# Altium PCB v2.PcbDoc
Units mil, origin at the board's own origin, x right, y up, seen from the top; angles counter-clockwise.
Board outline 2590 x 1100 mil, 2 copper layers (Top Layer, Bottom Layer); 48 components, 27 nets, 181 pads, 111 vias.
Unrouted connection lines stored in the file: 18.
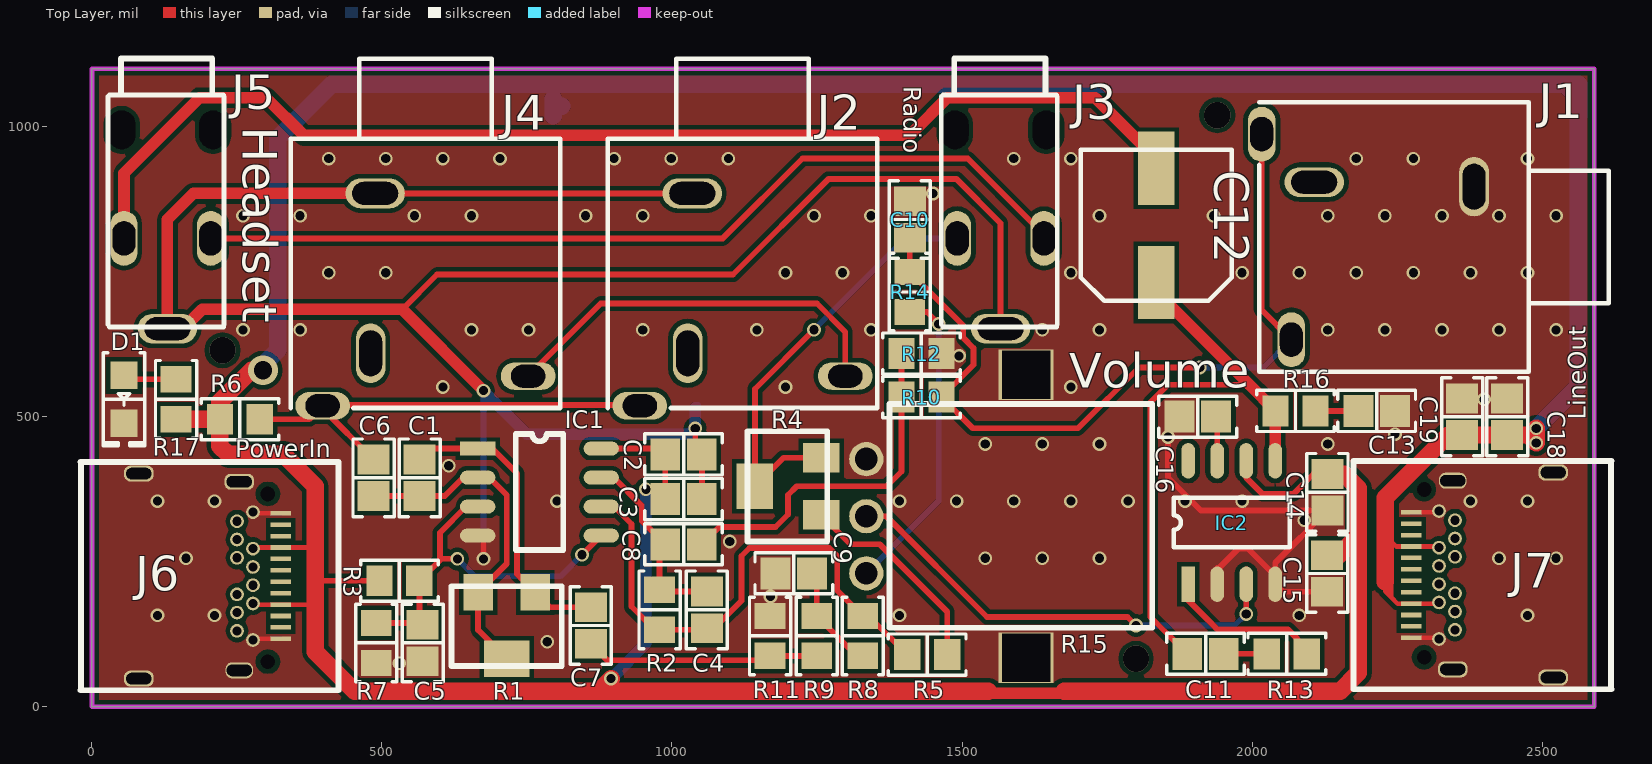
[diagram p0: Top Layer view]
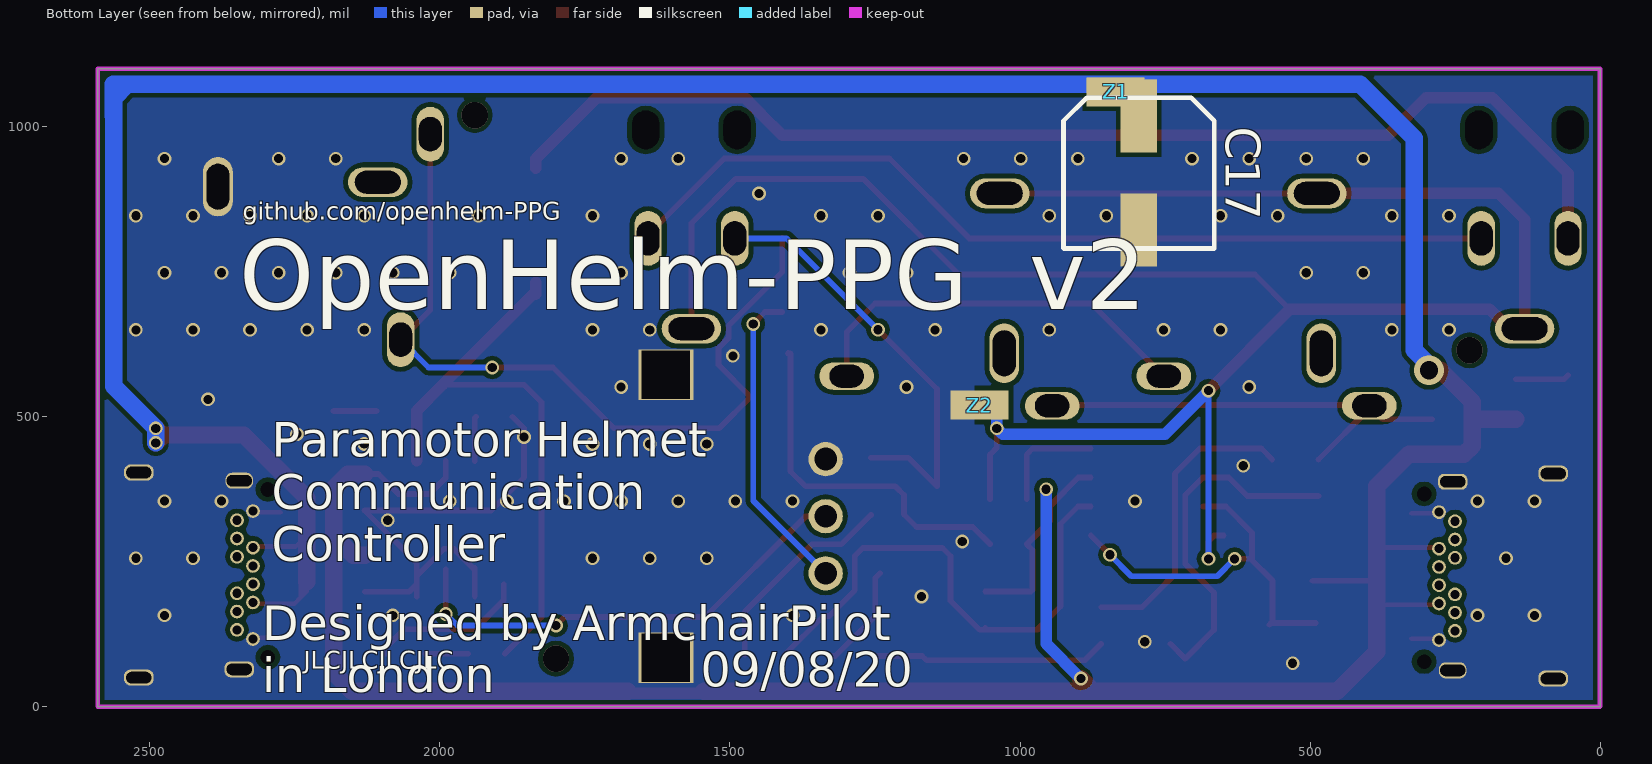
[diagram p1: Bottom Layer view, seen from below]
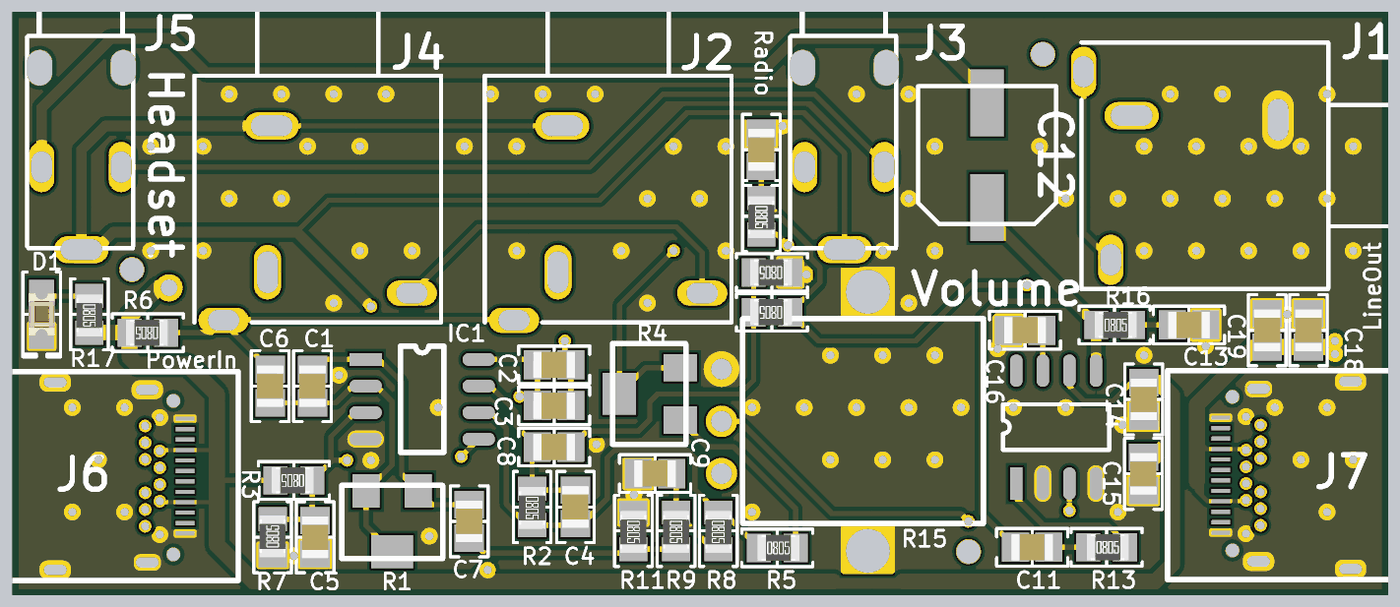
[diagram p2: 3D render of the assembled board from above, using the file's embedded part models]

## Layer stack, top to bottom
Top Solder: solder mask 0.4, Solder Resist, Dk 3.5
Top Layer: signal copper 1.4
Dielectric 1: dielectric 12.6, FR-4, Dk 4.8
Bottom Layer: signal copper 1.4
Bottom Solder: solder mask 0.4, Solder Resist, Dk 3.5

## Board outline
0,0 2590,0 2590,1100 0,1100

## Design rules (kind name [scope] priority, off if disabled: settings)
BoardOutlineClearance [All] p1: gap=7.87 ignorepadtopadclearanceinfootprint=FALSE except(15.75: Arc-SplitBarrior Arc-SplitContinuation Track-SplitBarrior Track-SplitContinuation SMDPad-SplitBarrior SMDPad-SplitContinuation THPad-SplitBarrior THPad-SplitContinuation Via-SplitBarrior Via-SplitContinuation Fill-SplitBarrior Fill-SplitContinuation Poly-SplitBarrior Poly-SplitContinuation Region-SplitBarrior Region-SplitContinuation Text-SplitBarrior Text-SplitContinuation)
Clearance "Clearance Bottom Layer" [OnLayer('Bottom Layer')] p1: gap=8 ignorepadtopadclearanceinfootprint=TRUE except(10: Arc-Text Track-Text SMDPad-Text THPad-Text Via-Text Fill-Text Poly-Text Region-Text Text-Text)
Clearance "Clearance Top Layer" [OnLayer('Top Layer')] p2: gap=8 ignorepadtopadclearanceinfootprint=TRUE except(10: Arc-Text Track-Text SMDPad-Text THPad-Text Via-Text Fill-Text Poly-Text Region-Text Text-Text)
Clearance [All] p3: gap=7.87 ignorepadtopadclearanceinfootprint=FALSE except(3.5: Arc-Arc Arc-Track Arc-SMDPad Track-Track Track-SMDPad SMDPad-SMDPad; 5: Arc-Via Track-Via SMDPad-Via THPad-Via Via-Via; 10: Arc-Text Track-Text SMDPad-Text THPad-Text Via-Text Fill-Text Poly-Text Region-Text Text-Text)
ComponentClearance Ignore [HasFootprint('NetConnector') Or HasFootprint('RK09') Or HasFootprint('LUMBERG150105')] p1: gap=0 collisioncheckmode=3 verticalgap=0 showdistances=FALSE
ComponentClearance ComponentClearance_1 [All] p2: gap=10 collisioncheckmode=3 verticalgap=10 showdistances=FALSE
HoleSize [All] p1: absolutevalues=TRUE maxlimit=248.03 minlimit=7.87 maxpercent=80.000 minpercent=20.000
MinimumAnnularRing [All] p1: minimumring=3
MinimumSolderMaskSliver [All] p1: minsoldermaskwidth=3.94
PolygonConnect PolygonConnect_1 [All] p1: connectstyle=Direct reliefconductorwidth=20 reliefentries=4 polygonreliefangle="90 Angle" airgapwidth=10
RoutingCorners [All] p1: cornerstyle=Round minsetback=100 maxsetback=100
RoutingVias [All] p1: holewidth=19.68 width=39.37 viastyle="Through Hole" minholewidth=7.87 minwidth=17.72 maxholewidth=39.37 maxwidth=78.74
ShortCircuit "Ignore GND-AGND" [InNet('GND') vs InNet('AGND')] p1: allowed=TRUE
ShortCircuit "Ignore VCC-VUSB" [InNet('VCC') vs InNet('VUSB')] p2: allowed=TRUE
ShortCircuit [All] p3: allowed=FALSE
SilkToSilkClearance [All] p1: silktosilkclearance=3.94
SilkToSolderMaskClearance [IsPad] p1: minsilkscreentomaskgap=3.94 clearancetoexposedcopper=TRUE
SolderMaskExpansion [All] p1: expansion=4
Width [All] p1: maxlimit=100 minlimit=3.5 preferedwidth=15
23 further rules are at their usual default settings.

## Components (designator, comment, footprint, x,y, rotation, side; value= is the part's Value field where it differs from the comment)
C1 "330pF" "CAP 0805_2012" 565,394.69 r90 top
C2 "100nF" "CAP 0805_2012" 1020,435 r180 top
C3 "22uF" "CAP 0805_2012" 1020,357.99 r180 top
C4 "330pF" "CAP 0805_2012" 1060,167.05 r90 top
C5 "100nF" "CAP 0805_2012" 570,110 r90 top
C6 "4.7uF" "CAP 0805_2012" 485.39,394.69 r270 top
C7 "2.2uF" "CAP 0805_2012" 860,140 r270 top
C8 "2.2uF" "CAP 0805_2012" 1020,280 r0 top
C9 "220nF" "CAP 0805_2012" 1210,230 r0 top
C10 "100nF" "CAP 0805_2012" 1410,840 r270 top
C11 "33nF" "CAP 0805_2012" 1920,91.18 r0 top
C12 "470uF" EEEFT-D8 1835,830 r90 top
C13 "470nF" "CAP 0805_2012" 2215,510 r180 top
C14 "100nF" "CAP 0805_2012" 2130,369.69 r90 top
C15 "22uF" "CAP 0805_2012" 2129.45,229.69 r90 top
C16 "100nF" "CAP 0805_2012" 1906.5,500 r0 top
C17 "470uF" EEEFT-D8 795,920 r270 bottom
C18 "100nF" "CAP 0805_2012" 2440,500 r270 top
C19 "22uF" "CAP 0805_2012" 2362.28,500 r270 top
D1 "Red" "LED 0805_2012 RED" 55.2,530 r270 top
IC1 "LM4562" LM4562 665,445 r270 top
IC2 "LM386" LM386D 1890,211.3 r0 top
J1 "LineOut" KLBR4 2245,810 r270 top locked
J2 "Radio" KLBR4 1121.61,747.2 r0 top locked
J3 "Radio-2.5" LUMBERG150105 1566.5,835 r0 top locked
J4 "Headset-3.5" KLBR4 574.88,747.2 r0 top locked
J5 "Headset" LUMBERG150105 130,835 r0 top locked
J6 "PowerIn" MC001002 303.15,367.01 r270 top locked
J7 "USB-C-Power-Out" MC001002 2296.85,85.32 r90 top locked
R1 "Gain" 3224W 715,140 r0 top value=20k
R2 "22k" "RES 0805_2012" 978.5,167.05 r270 top
R3 "100k" "RES 0805_2012" 530,217.2 r180 top
R4 "RadioIn" 3224W 1200,380 r270 top value=50k
R5 "22k" "RES 0805_2012" 1440,90 r0 top
R6 "5.6K" "RES 0805_2012" 255,495.55 r180 top value=5.6k
R7 "100k" "RES 0805_2012" 490,110 r90 top
R8 "22k" "RES 0805_2012" 1329.02,122.13 r270 top
R9 "33" "RES 0805_2012" 1249.57,122.13 r270 top
R10 "33" "RES 0805_2012" 1430,533.9 r180 top
R11 "5.6k" "RES 0805_2012" 1169.05,122.13 r270 top
R12 "5.6k" "RES 0805_2012" 1430,608.9 r180 top
R13 "15k" "RES 0805_2012" 2060,91.18 r0 top
R14 "91k" "RES 0805_2012" 1410,715 r270 top
R15 "Volume" RK09 1335,328.43 r270 top locked value=10K
R16 "5.1" "RES 0805_2012" 2075,510 r0 top
R17 "180" "RES 0805_2012" 145,530 r270 top
Z1 "NetConnector" NetConnector 835,1060 r0 bottom
Z2 "NetConnector" NetConnector 1070,520 r0 bottom

## Footprints (in the part's own frame and the unit in brackets; to place one, negate y for a bottom-side part, rotate by r counter-clockwise, add the part's x,y. Pads: shape width x height; smd on the part's side, far side on the other; paste and mask are expansions set on the pad)
3224W [mm]
  rect 1.3x1.6 smd: 1(-1.25,1.45) 3(1.25,1.45)
  rect 2x1.6 smd: 2(0,-1.45)
  silkscreen extent -2.41,-1.78 2.41,1.72
"CAP 0805_2012" [mm] "Chip Capacitor, 2-Leads, Body 2.00x1.20mm, IPC Medium Density"
  rect 1.3x1.4 smd: 1(-0.8,0) 2(0.8,0)
  silkscreen extent -1.7,-0.9 1.7,0.9, body extent -1,-0.64 1,0.64, height 1.26
EEEFT-D8 [mm]
  rect 3.2x1.6 smd: 1(-2.5,0) 2(2.5,0)
  silkscreen extent -3.3,-3.3 3.3,3.3
KLBR4 [mm]
  oval 1.3x2.6 hole 1 slot 2 at 90 deg: B(-2.4,-3.5)
  oval 2.4x1.2 hole 1 slot 1.5 at 0 deg: R(-4.5,-5.8) T(4.5,-4.5)
  oval 2.6x1.3 hole 1 slot 2 at 0 deg: S(-2.2,3.5)
  silkscreen extent -5.9,-5.9 5.9,9.4
"LED 0805_2012 RED" [mm] "Chip Diode, 2-Leads, Body 2.00x1.25mm, IPC Medium Density"
  rect 1.2x1.2 smd: 1(-1.05,0) 2(1.05,0)
  silkscreen extent -2.03,-0.9 2.03,0.9, body extent -1,-0.62 1,0.63, height 0.9
LM386D [mm]
  rect 0.6x1.55 smd: 1(0,0)
  oval 0.6x1.55 smd: 2(1.27,0) 3(2.54,0) 4(3.81,0) 5(3.81,5.4) 6(2.54,5.4) 7(1.27,5.4) 8(0,5.4)
  silkscreen extent -0.64,1.61 4.44,3.79
LM4562 [mil]
  rect 24x61 smd: 1(0,0)
  oval 24x61 smd: 2(50,0) 3(100,0) 4(150,0) 5(150,213) 6(100,213) 7(50,213) 8(0,213)
  silkscreen extent -25,66 175,148
LUMBERG150105 [mm]
  oval 1.2x2.4 hole 1 slot 1.5 at 90 deg: R(1.9,-0.699) T(-1.9,-0.699)
  oval 2.6x1.3 hole 1 slot 2 at 0 deg: S(0,-4.65)
  round 0 hole 1.2 slot 1.7 at 90 deg: ""(-2,4.052) ""(2,4.052)
  silkscreen extent -2.6,-4.58 2.48,7.18
MC001002 [mm]
  rect 0.2x0.9 smd: A1(0.85,0.56) A2(1.35,0.56) A3(1.85,0.56) A4(2.35,0.56) A5(2.85,0.56) A6(3.35,0.56) A7(3.85,0.56) A8(4.35,0.56) A9(4.85,0.56) A10(5.35,0.56) A11(5.85,0.56) A12(6.35,0.56)
  round 0.6 hole 0.4: B1(6.4,-0.65) B2(6,-1.35) B3(5.2,-1.35) B4(4.8,-0.65) B5(4.4,-1.35) B6(4,-0.65) B7(3.2,-0.65) B8(2.8,-1.35) B9(2.4,-0.65) B10(2,-1.35) B11(1.2,-1.35) B12(0.8,-0.65)
  rrect80% 0.7x1.3 hole 1.1 slot 0.5 at 0 deg: S1(-0.53,-1.25) S3(-0.89,-5.65) S4(8.09,-5.65)
  rrect80% 0.7x1.2 hole 1.1 slot 0.5 at 0 deg paste+0 mask+0.05: S2(7.73,-1.25)
  round 0 hole 0.65 mask+0: ""(0,0) ""(7.35,0)
  silkscreen extent -1.4,-8.2 8.6,3.1
NetConnector [mil]
  rect 50x50 smd paste+0 mask+0: 1(-25,0) 2(25,0)
"RES 0805_2012" [mm] "Chip Resistor, 2-Leads, Body 2.00x1.25mm, IPC Medium Density"
  rect 1.15x1.35 smd: 1(-0.875,0) 2(0.875,0)
  silkscreen extent -1.7,-0.9 1.7,0.9, body extent -0.95,-0.62 1.05,0.63, height 0.6
RK09 [mm]
  round 1.5 hole 1: 1(-2.5,0) 2(0,0) 3(2.5,0)
  rect 2.2x2.4 hole 2.1 square: ""(-6.2,7) ""(6.2,7)
  silkscreen extent -4.91,1.02 4.89,12.52

## Part data
C1 C4: library part C0805C565K9PACTU, "Multilayer Ceramic Capacitors MLCC - SMD/SMT 330pF 50V 0805 RoHS", Device Package="0805 (2012 Metric)", Supplier Part Number 1=C51207, Voltage - Rated=50V, ComponentLink1Description=Datasheet, ComponentLink1URL=https://api.kemet.com/component-edge/download/datasheet/C0805C565K9PACTU.pdf, ComponentLink2Description="DigiKey Link", ComponentLink2URL=http://digikey.com/product-detail/en/kemet/C0805C565K9PACTU/399-3135-1-ND/551640, Package / Case="0805 (2012 Metric)", Supplier 1=LCSC
C2 C5 C10 C14 C16 C18: library part C0805C565K9PACTU, "Multilayer Ceramic Capacitors MLCC - SMD/SMT 100nF 50V 0805 RoHS", Device Package="0805 (2012 Metric)", Supplier Part Number 1=C49678, Voltage - Rated=50V, ComponentLink1Description=Datasheet, ComponentLink1URL=https://api.kemet.com/component-edge/download/datasheet/C0805C565K9PACTU.pdf, ComponentLink2Description="DigiKey Link", ComponentLink2URL=http://digikey.com/product-detail/en/kemet/C0805C565K9PACTU/399-3135-1-ND/551640, Package / Case="0805 (2012 Metric)", Supplier 1=LCSC
C3 C15 C19: library part C0805C565K9PACTU, "Multilayer Ceramic Capacitors MLCC - SMD/SMT 22uF 25V 0805 RoHS", Device Package="0805 (2012 Metric)", Supplier Part Number 1=C45783, Voltage - Rated=25V, ComponentLink1Description=Datasheet, ComponentLink1URL=https://api.kemet.com/component-edge/download/datasheet/C0805C565K9PACTU.pdf, ComponentLink2Description="DigiKey Link", ComponentLink2URL=http://digikey.com/product-detail/en/kemet/C0805C565K9PACTU/399-3135-1-ND/551640, Package / Case="0805 (2012 Metric)", Supplier 1=LCSC
C6: library part C0805C565K9PACTU, "Multilayer Ceramic Capacitors MLCC - SMD/SMT 4.7uF 25V 0805 RoHS", Device Package="0805 (2012 Metric)", Supplier Part Number 1=C1779, Voltage - Rated=25V, Package / Case="0805 (2012 Metric)", Supplier 1=LCSC
C7 C8: library part C0805C565K9PACTU, "Multilayer Ceramic Capacitors MLCC - SMD/SMT 2.2uF 50V 0805 RoHS", Device Package="0805 (2012 Metric)", Supplier Part Number 1=C49217, Voltage - Rated=50V, ComponentLink1Description=Datasheet, ComponentLink1URL=https://api.kemet.com/component-edge/download/datasheet/C0805C565K9PACTU.pdf, ComponentLink2Description="DigiKey Link", ComponentLink2URL=http://digikey.com/product-detail/en/kemet/C0805C565K9PACTU/399-3135-1-ND/551640, Package / Case="0805 (2012 Metric)", Supplier 1=LCSC
C9: library part C0805C565K9PACTU, "Multilayer Ceramic Capacitors MLCC - SMD/SMT 220nF 50V 0805 RoHS", Device Package="0805 (2012 Metric)", Supplier Part Number 1=C5378, Voltage - Rated=50V, ComponentLink1Description=Datasheet, ComponentLink1URL=https://api.kemet.com/component-edge/download/datasheet/C0805C565K9PACTU.pdf, ComponentLink2Description="DigiKey Link", ComponentLink2URL=http://digikey.com/product-detail/en/kemet/C0805C565K9PACTU/399-3135-1-ND/551640, Package / Case="0805 (2012 Metric)", Supplier 1=LCSC
C11: library part C0805C565K9PACTU, "Multilayer Ceramic Capacitors MLCC - SMD/SMT 33nF 50V 0805 RoHS", Device Package="0805 (2012 Metric)", Supplier Part Number 1=C1739, Voltage - Rated=50V, Package / Case="0805 (2012 Metric)", Supplier 1=LCSC
C12 C17: library part 6TCE150M, "SMD Aluminium Electrolytic Capacitor, Radial Can - SMD, 470 µF, 10 V, 0.16 ohm, FT Series", Supplier Part Number 1=2065963, Voltage - Rated=10V, Supplier 1=Farnell
C13: library part C0805C565K9PACTU, "Multilayer Ceramic Capacitors MLCC - SMD/SMT 470nF 50V 0805 RoHS", Device Package="0805 (2012 Metric)", Supplier Part Number 1=C13967, Voltage - Rated=50V, Package / Case="0805 (2012 Metric)", Supplier 1=LCSC
D1: library part APT2012SURCK, "LIGHT EMITTING DIODES (LED) RED 615~630NM 67~195MCD@20MA TOP VIEW 0805 ROHS", Device Package="0805 (2012 Metric)", Supplier Part Number 1=C84256, Color=Red, Package / Case="0805 (2012 Metric)", Supplier 1=LCSC
IC1: Supplier Part Number 1=3004534, Supplier 1=Farnell
IC2: Supplier Part Number 1=3004530, Supplier 1=Farnell
J1 J2 J4: library part KLBR4, "Phone Audio Connector, 3 Contacts, Socket, 3.5 mm, PCB Mount, Silver Plated Contacts, Metal Body", Supplier Part Number 1=1217016, Supplier 1=Farnell
J3 J5: library part LUMBERG150105, "Phone Audio Connector, 3 Contacts, Socket, 2.5 mm, PCB Mount, Silver Plated Contacts, Metal Body", Supplier Part Number 1=1216978, Supplier 1=Farnell
J6 J7: library part USBC, "USB Connector, USB Type C, USB 3.1, Receptacle, 24 Ways, Surface Mount, Through Hole Mount", Supplier Part Number 1=2498948, Supplier 1=Farnell
R1: library part RPot, "20K ±10% ±100ppm/°C Variable Resistors", Supplier Part Number 1=514998, Supplier 1=Farnell
R2 R5 R8: library part TLRZ2ATTD, "Chip Resistor - Surface Mount 22KOhms ±1% 1/8W 0805 RoHS", Device Package="0805 (2012 Metric)", Supplier Part Number 1=C17560, Package / Case="0805 (2012 Metric)", Supplier 1=LCSC
R3 R7: library part TLRZ2ATTD, "Chip Resistor - Surface Mount 100KOhms ±1% 1/8W 0805 RoHS", Device Package="0805 (2012 Metric)", Supplier Part Number 1=C17407, Package / Case="0805 (2012 Metric)", Supplier 1=LCSC
R4: library part RPot, "50K ±10% ±100ppm/°C Variable Resistors", Supplier Part Number 1=1612575, Supplier 1=Farnell
R6 R11 R12: library part TLRZ2ATTD, "Chip Resistor - Surface Mount 5.6KOhms ±1% 1/8W 0805 RoHS", Device Package="0805 (2012 Metric)", Supplier Part Number 1=C4382, Package / Case="0805 (2012 Metric)", Supplier 1=LCSC
R9 R10: library part TLRZ2ATTD, "Chip Resistor - Surface Mount 33Ohms ±1% 1/8W 0805 RoHS", Device Package="0805 (2012 Metric)", Supplier Part Number 1=C17634, Package / Case="0805 (2012 Metric)", Supplier 1=LCSC
R13: library part TLRZ2ATTD, "Chip Resistor - Surface Mount 15KOhms ±1% 1/8W 0805 RoHS", Device Package="0805 (2012 Metric)", Supplier Part Number 1=C17475, Package / Case="0805 (2012 Metric)", Supplier 1=LCSC
R14: library part TLRZ2ATTD, "Chip Resistor - Surface Mount 91KOhms ±1% 1/8W 0805 RoHS", Device Package="0805 (2012 Metric)", Supplier Part Number 1=C17866, Package / Case="0805 (2012 Metric)", Supplier 1=LCSC
R15: library part RPot, "Rotary Potentiometer, 10 kohm, 1 Turns, Logarithmic, 50 mW, ± 20%, RK09 Series", Supplier Part Number 1=1191724, Supplier 1=Farnell
R16: library part TLRZ2ATTD, "Chip Resistor - Surface Mount 5.1Ohms ±1% 1/8W 0805 RoHS", Device Package="0805 (2012 Metric)", Supplier Part Number 1=C17724, Package / Case="0805 (2012 Metric)", Supplier 1=LCSC
R17: library part RG2012P-275-B-T5, "Chip Resistor - Surface Mount 180Ohms ±1% 1/8W 0805 RoHS", Device Package="0805 (2012 Metric)", Supplier Part Number 1=C25270, ComponentLink1Description=Datasheet, ComponentLink1URL=http://www.susumu.co.jp/common/pdf/n_catalog_partition01_en.pdf, ComponentLink2Description="DigiKey Link", ComponentLink2URL=http://digikey.com/product-detail/en/susumu/RG2012P-275-B-T5/408-2028-1-ND/7035411, Package / Case="0805 (2012 Metric)", Supplier 1=LCSC

## Via types
v1: diameter 23.62, hole 15.75, Top Layer to Bottom Layer, 107 vias
v2: diameter 45.35, hole 45.35, Top Layer to Bottom Layer, 3 vias
v3: diameter 51.18, hole 31.5, Top Layer to Bottom Layer, 1 vias

## Nets (pads, with @x,y where several pads share a name; then routed paths per layer and width w, separated by ;. In a path a pad name is that pad's centre, name@x,y a point inside that pad or via, vN(x,y) a via of type N, cw(c..) or ccw(c..) an arc to the next point about the centre after c; other vN are vias at no path point)
AGND: C2.1 C3.1 IC1.4 J2.S J3.S J4.S J5.S Z2.1 | length 4020.1
  Top Layer w10: J5.S J5.S@156.93,651.93 ; J4.S J2.S ; 535,685 595,745 1105,745 1270.09,910.09 1489.91,910.09 1566.5,833.5 J3.S ; IC1.4@648.74,295 IC1.4 675,285 v1(675,255) v1@675,254.8 ; v1(1040,480) 1040,446.5 C2.1 C3.1 ; J3.S@1553.07,651.93 J3.S ; J3.S@1586.93,651.93 J3.S
  Top Layer w20: J5.S 130,840 175,885 J4.S ; J5.S@156.93,651.93 190,685 535,685 v1(675,545)
  Bottom Layer w10: v1@675,254.8 v1(675,255) v1(675,545) ; Z2.1@1040,515 Z2.1
  Bottom Layer w20: v1(675,545) 750,470 1030,470 v1(1040,480) Z2.1@1040,515
GND: C5.1 C9.1 C10.1 C13.1 C14.1 C15.1 C16.1 C17.2 C18.1 C19.1 D1.2 IC2.2 IC2.4 J1.S J6.A1 J6.A12 J6.B1 J6.B12 J6.S1 J6.S2 J6.S3 J6.S4 J7.A1 J7.A12 J7.B1 J7.B12 J7.S1 J7.S2 J7.S3 J7.S4 R7.1 R11.1 R12.1 R15. R15.1 Z2.2 | length 1069.9
  Top Layer w7.87: J6.B1 279.53,117.01 J6.A12 ; J6.B12 279.53,333.54 J6.A1 ; J7.A1 2320.47,118.78 J7.B12 ; J7.A12 2320.47,335.32 J7.B1
  Top Layer w10: C16.1 1855,480 1855,395 1911.81,338.19 C14.1 2040,248.19 IC2.4@2040,225.55 ; IC2.2@1940,190 IC2.2 IC2.2@1940,236.3 ; IC2.2@1940,239.17 IC2.2@1940,236.3 ; IC2.4@2040,189.72 IC2.4 ; C15.1 2053.11,198.19 IC2.4 ; IC2.2@1940,236.3 1976.22,272.52 1993.03,272.52 IC2.4@2040,225.55 ; IC2.4 IC2.4@2040,225.55
  other v1: 530,75 785,112.13 112.87,157.6 211.3,157.6 1392.4,157.6 2081.38,157.6 2475.08,157.6 1170,190 162.09,256.02 1540.04,256.02 1638.46,256.02 1736.89,256.02 2425.87,256.02 2524.29,256.02 1099.51,285 2090,321.54 112.87,354.45 211.3,354.45 801.85,354.45 1392.4,354.45 1490.83,354.45 1589.25,354.45 1687.68,354.45 1786.1,354.45 1884.53,354.45 1982.95,354.45 2376.65,354.45 2475.08,354.45 615,415.39 1540.04,452.87 1638.46,452.87 1736.89,452.87 2130.59,452.87 1855,465 2246.5,470 2400,530 605,551.3 1195.55,551.3 1687.68,551.3 1495,605 260.51,649.72 358.94,649.72 654.21,649.72 752.64,649.72 949.49,649.72 1146.34,649.72 1343.19,649.72 1638.46,649.72 1736.89,649.72 2130.59,649.72 2229.02,649.72 2327.44,649.72 2425.87,649.72 2524.29,649.72 408.15,748.15 506.57,748.15 1195.55,748.15 1293.98,748.15 1687.68,748.15 1982.95,748.15 2081.38,748.15 2179.8,748.15 2278.23,748.15 2376.65,748.15 2475.08,748.15 260.51,846.57 358.94,846.57 555.79,846.57 654.21,846.57 851.06,846.57 949.49,846.57 1244.76,846.57 1343.19,846.57 1736.89,846.57 1933.74,846.57 2130.59,846.57 2229.02,846.57 2327.44,846.57 2425.87,846.57 2524.29,846.57 1450,885 408.15,945 506.57,945 605,945 703.43,945 900.28,945 998.7,945 1097.13,945 1589.25,945 1687.68,945 2179.8,945 2278.23,945 2475.08,945
LineOut: C10.2 J1.R J1.T R10.1 R14.1 | length 1407.7
  Top Layer w10: C10.2 R14.1 1502.32,657.13 1502.32,635.94 1520,618.26 1520,589.45 R10.1 1518.35,480 1700,480 1805,585 v1(1910,585) ; J1.R 2016.65,684.02 J1.T
  Bottom Layer w10: v1(1910,585) 2020,585 J1.T
Mic: C6.1 J2.R J4.R R6.1 | length 796.2
  Top Layer w10: R6.1 374.41,495.55 J4.R ; C6.1 397.72,513.86 J4.R ; J2.R 943.31,520 398.86,520 J4.R
  Bottom Layer w10: J4.R J4.R@398.86,520
NetC1_1: C1.1 C6.2 IC1.2 R1.1 R1.2 | length 614.3
  Top Layer w10: C6.2 C1.1 608.19,363.19 640,395 IC1.2 685,395 715,365 715,246.3 R1.1 665.79,132.13 R1.2 R1.2@740.59,108.5
NetC1_2: C1.2 C7.1 IC1.1 R1.3 | length 517.8
  Top Layer w10: C1.2 583.82,445 IC1.1 690,445 733,402 733,228.3 R1.3 789.8,171.5 C7.1
NetC4_1: C4.1 IC1.6 R2.2 R5.1 R8.1 | length 917.7
  Top Layer w10: IC1.6 900,345 930,315 930,172.68 970.09,132.6 R2.2 C4.1@1057.05,132.6 ; C4.1 C4.1@1057.05,132.6 ; R5.1 1338.98,156.57 R8.1 1285,200.59 1285,260 1271.26,273.74 1133.78,273.74 1120,259.96 1120,182.68 1069.91,132.6 C4.1@1057.05,132.6
NetC4_2: C4.2 C8.1 IC1.7 R2.1 | length 338.8
  Top Layer w10: IC1.7 899.69,395 948,346.69 948,320.5 C8.1 978.5,270 R2.1 981.46,198.54 C4.2
NetC7_2: C7.2 R9.2 R11.2 | length 404.6
  Top Layer w10: C7.2 888.5,80 1161.38,80 R11.2 R9.2
NetC8_2: C8.2 R10.2 R12.2 | length 620.6
  Top Layer w10: C8.2 1081.5,310 1178.46,310 1200,331.54 1200,365 1215,380 1370,380 1395.55,405.55 R10.2 R12.2 ; R12.2@1399.45,610 R12.2@1400.55,608.9
NetC9_2: C9.2 R8.2 R9.1 | length 184.8
  Top Layer w10: C9.2 1249.57,221.93 R9.1 1318.46,87.68 R8.2
NetC11_1: C11.1 C12.1 IC2.5 R16.1 | length 1041.1
  Top Layer w10: C11.1 1825,154.68 1825,525 1855,555 1995.55,555 ; R16.1@2040,509.45 R16.1
  Top Layer w20: C12.1@1835,710.91 C12.1@1839.65,710.91 ; C12.1 1835,715.55 C12.1@1839.65,710.91 ; IC2.5 2040,509.45 2040,510.55 1995.55,555 C12.1@1839.65,710.91
NetC11_2: C11.2 R13.1 | length 74.1
  Top Layer w10: C11.2 R13.1
NetC13_2: C13.2 R16.2 | length 74.1
  Top Layer w10: R16.2 C13.2
NetC16_2: C16.2 IC2.7 | length 76.9
  Top Layer w10: C16.2 1940,497.99 IC2.7
NetD1_1: D1.1 R17.1 | length 92.7
  Top Layer w10: D1.1 62.09,564.45 R17.1
NetIC2_1: IC2.1 R13.2 | length 276
  Top Layer w10: IC2.1 1890,183.5 1940,133.5 2061.5,133.5 2094.45,100.55 R13.2
NetIC2_3: IC2.3 R15.2 | length 818.3
  Top Layer w10: R15.2 1369.52,328.43 1543.26,154.68 1785.32,154.68 v1(1800,140) ; v1(1990,160) IC2.3 IC2.3@1990,237
  Bottom Layer w10: v1(1800,140) 1970,140 v1(1990,160)
NetJ2_T: J2.T J4.T | length 694.9
  Top Layer w10: J4.T 877.01,695 1250,695 1298.78,646.22 J2.T
NetJ3_R: J3.R J5.R | length 1554
  Top Layer w10: J5.R 1087.5,807.5 1225,945 1510,945 1641.3,813.7 J3.R
NetR4_3: R4.3 R5.2 | length 360.2
  Top Layer w10: R4.3 1307.87,280 1358.07,280 1474.45,163.62 R5.2
NetR14_2: R14.2 R15.3 | length 540.3
  Top Layer w10: R14.2 1439.45,680.55 v1(1460,660)
  Bottom Layer w10: R15.3 1460,355 v1(1460,660)
RadioIn: J3.T R4.1 R4.2 | length 758.8
  Top Layer w10: v1(1245,650) 1142.91,547.91 R4.2 1192.13,429.21 R4.1
  Bottom Layer w10: v1(1245,650) 1402.5,807.5 J3.T
Speaker: C12.2 J5.T | length 2060.2
  Top Layer w10: J5.T J5.T@55.2,844.8
  Top Layer w20: J5.T@55.2,844.8 55.2,919.72 185.47,1050 300,1050 365,985 1410,985 1446.13,1021.13 1446.13,1021.61 1474.52,1050 1730,1050 1835,945 C12.2
VBias: C5.2 IC1.3 IC1.5 R3.1 R7.2 | length 675.4
  Top Layer w10: R7.2 C5.2@567.05,144.45 ; C5.2 C5.2@567.05,144.45 ; v1(630,255) 602.24,255 600,252.76 ; IC1.3@683.86,345 IC1.3 645,345 600,300 600,252.76 ; v1(845,262) IC1.5 ; C5.2@567.05,144.45 564.45,147.05 R3.1 600,252.76
  Bottom Layer w10: v1(630,255) 660,225 808,225 v1(845,262)
VCC: C2.2 C3.2 C14.2 C15.2 C17.1 IC1.8 IC2.6 J6.A4 J6.A9 J6.B4 J6.B9 R3.2 R6.2 R17.2 Z1.1 | length 5053.5
  Top Layer w7.87: J6.B4 279.53,176.06 J6.A9 370,176.06 ; J6.B9 279.53,274.49 J6.A4 370,274.49
  Top Layer w10: J6.B4@277.56,176.81 J6.B4 ; J6.B9 J6.B9@277.56,273.74 ; 385,215 387.2,217.2 R3.2 ; IC1.8 978.5,445 C2.2 C3.2 ; IC2.6 1990,394.69 2017.68,367.01 2072.01,367.01 2106.18,401.18 C14.2
  Top Layer w20: 1545,26.94 1548.91,23.02 1669.39,23.02
  Top Layer w30: R17.2 R6.2 ; v3(295,580) 275,580 220.55,525.55 R6.2 ; v1(895,48.5) 873.43,26.94 ; 1545,26.94 873.43,26.94 ; 1676.26,26.94 2151.94,26.94 2183.5,58.5 2183.5,295 ; C15.2 2149.69,261.18 2183.5,295 ; C14.2 2158.82,401.18 2183.5,376.5 2183.5,295 ; R6.2 220.55,449.45 235,435 330,435 385,380 385,215 385,95 453.06,26.94 873.43,26.94
  Bottom Layer w20: v1(895,48.5) 955,108.5 v1(955,375)
  Bottom Layer w30: v3(295,580) 295,589.41 320,614.41 320,980 413.06,1073.06 C17.1@800,1073.06 ; C17.1 C17.1@795,1035.06 ; C17.1@795,1048.06 C17.1@795,1035.06 ; C17.1@810,1035.06 C17.1@795,1035.06
VUSB: C18.2 C19.2 J7.A4 J7.A9 J7.B4 J7.B9 Z1.2 | length 3292
  Top Layer w7.87: 2230,215 2230,198.78 2240,188.78 ; 2230,295 2248.74,276.26 J7.A9 2320.47,276.26 J7.B4 ; 2240,265 2240,188.78 ; J7.B9 2320.47,177.83 J7.A4 2250.94,177.83 2240,188.78
  Top Layer w30: 2230,215 2230,295 2230,360 2338.5,468.5 C19.2 C18.2 2476.5,468.5 ; 2476.5,468.5 v1(2490,455) v1(2490,480) 2478.5,468.5 2476.5,468.5
  Bottom Layer w30: 778.06,1073.06 2539.13,1073.06 ; v1(2490,455) v1(2490,480) 2562.81,552.81 2562.81,1018.43 ; 2539.13,1073.06 2563.06,1073.06 2563.06,1018.68 2562.81,1018.43 ; 2539.13,1073.06 2562.81,1049.38 2562.81,1018.43
pads on no net: IC2.8 J1.B J2.B J3. J4.B J5. J6. J6.A2 J6.A3 J6.A5 J6.A6 J6.A7 J6.A8 J6.A10 J6.A11 J6.B2 J6.B3 J6.B5 J6.B6 J6.B7 J6.B8 J6.B10 J6.B11 J7. J7.A2 J7.A3 J7.A5 J7.A6 J7.A7 J7.A8 J7.A10 J7.A11 J7.B2 J7.B3 J7.B5 J7.B6 J7.B7 J7.B8 J7.B10 J7.B11
copper on no net:
  other v2: 1800,82.91 225,614.41 1940,1020

## Polygon pours and split planes (outlines as drawn)
GND on Top Layer "Top Layer-GND" (solid, remove dead copper, pour order 10): 0,1100 0,0 2590,0 2590,1100
AGND on Top Layer "Top Layer-AGND" (solid, remove dead copper, pour order 17): 572.24,225 762.37,225 762.37,476.34 570,476.34
GND on Bottom Layer "Bottom Layer-GND" (solid, remove dead copper, pour order 12): 0,1100 0,0 2590,0 2590,1100

## Keep-outs
Keep-Out Layer:
  the board outline again, w7.87

## Other copper
Top Layer:
  region net VUSB: 2230,198.78 2236.22,205 2240,205 2240,188.78
  region net NetC8_2: 1355,610

## Silkscreen, mask and mechanical layers (free items; w line width, h text height)
Bottom Overlay:
  text "github.com/openhelm-PPG" at 2340,840 h30
  text "OpenHelm-PPG  v2" at 2346.06,685 h120
  text "Paramotor Helmet / Communication  / Controller" at 2290,250.81 h60
  text "JLCJLCJLCJLC" at 2235,65.73 h30
  text "09/08/20" at 1550,34.22 h60
  text "Designed by ArmchairPilot / in London" at 2306.73,25 h60